# EAGLE board main V.2 (EAGLE 9.1.3)
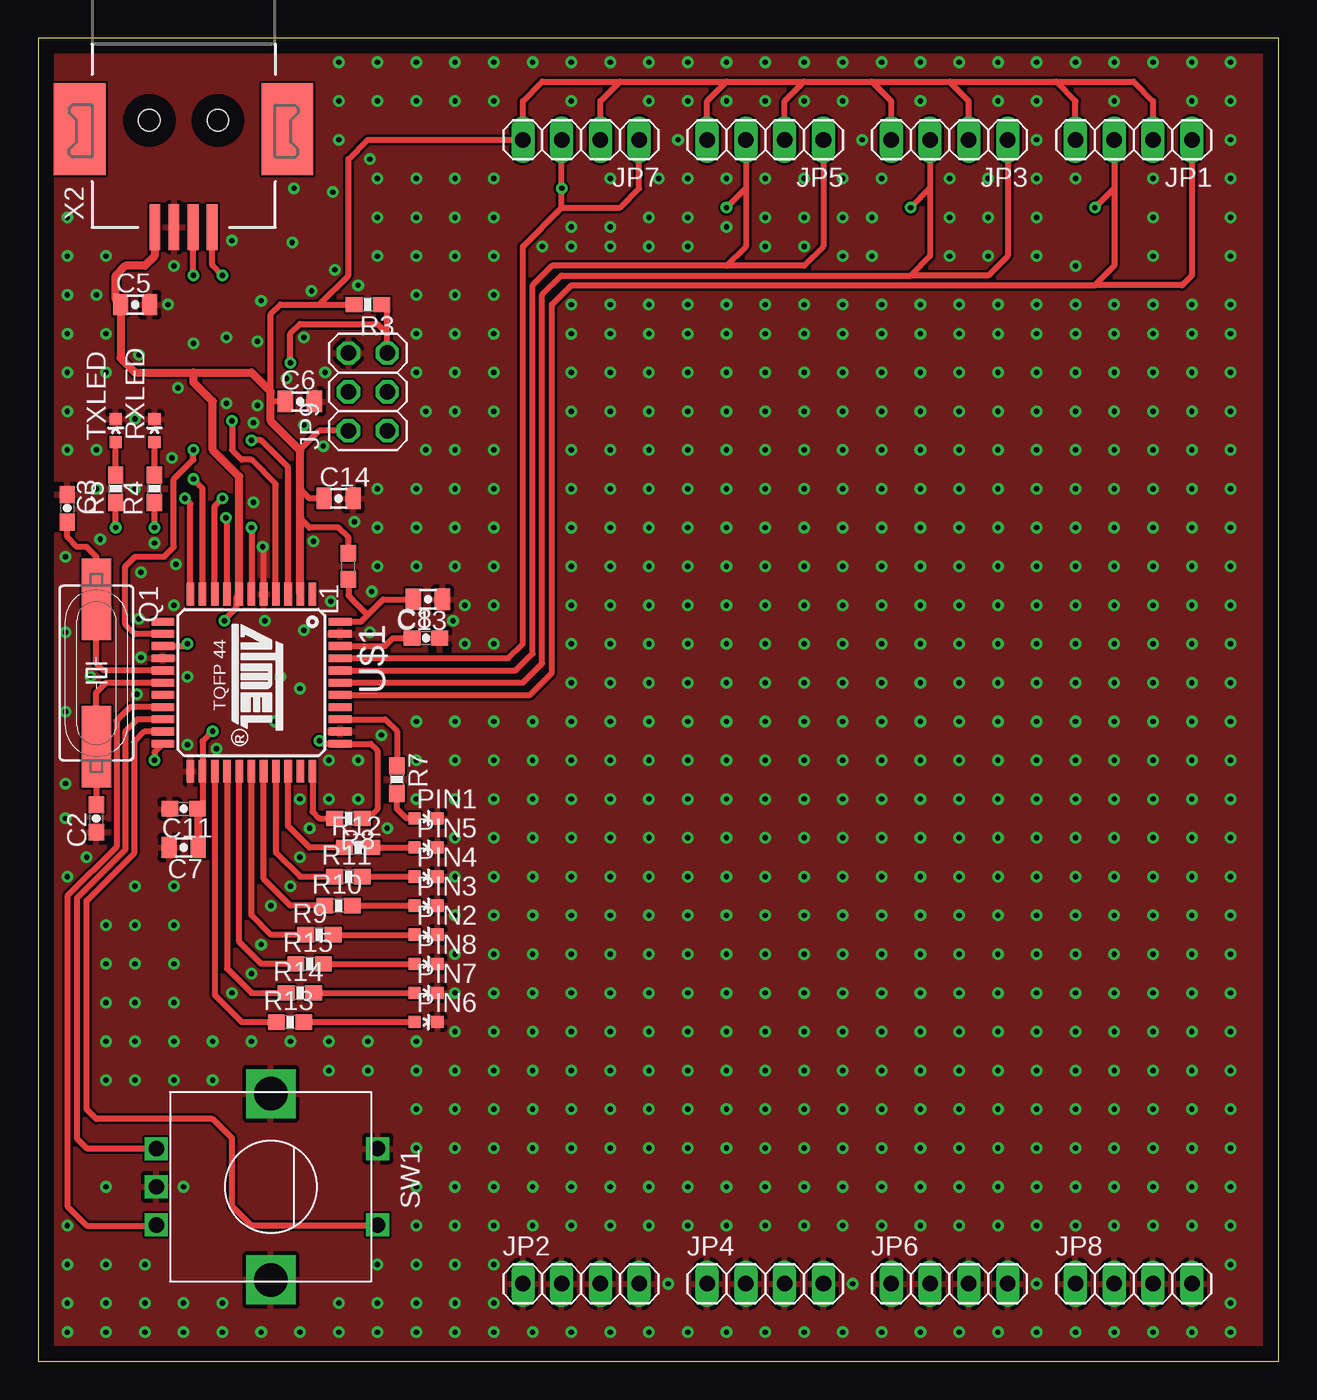
[diagram p0: board, top side]
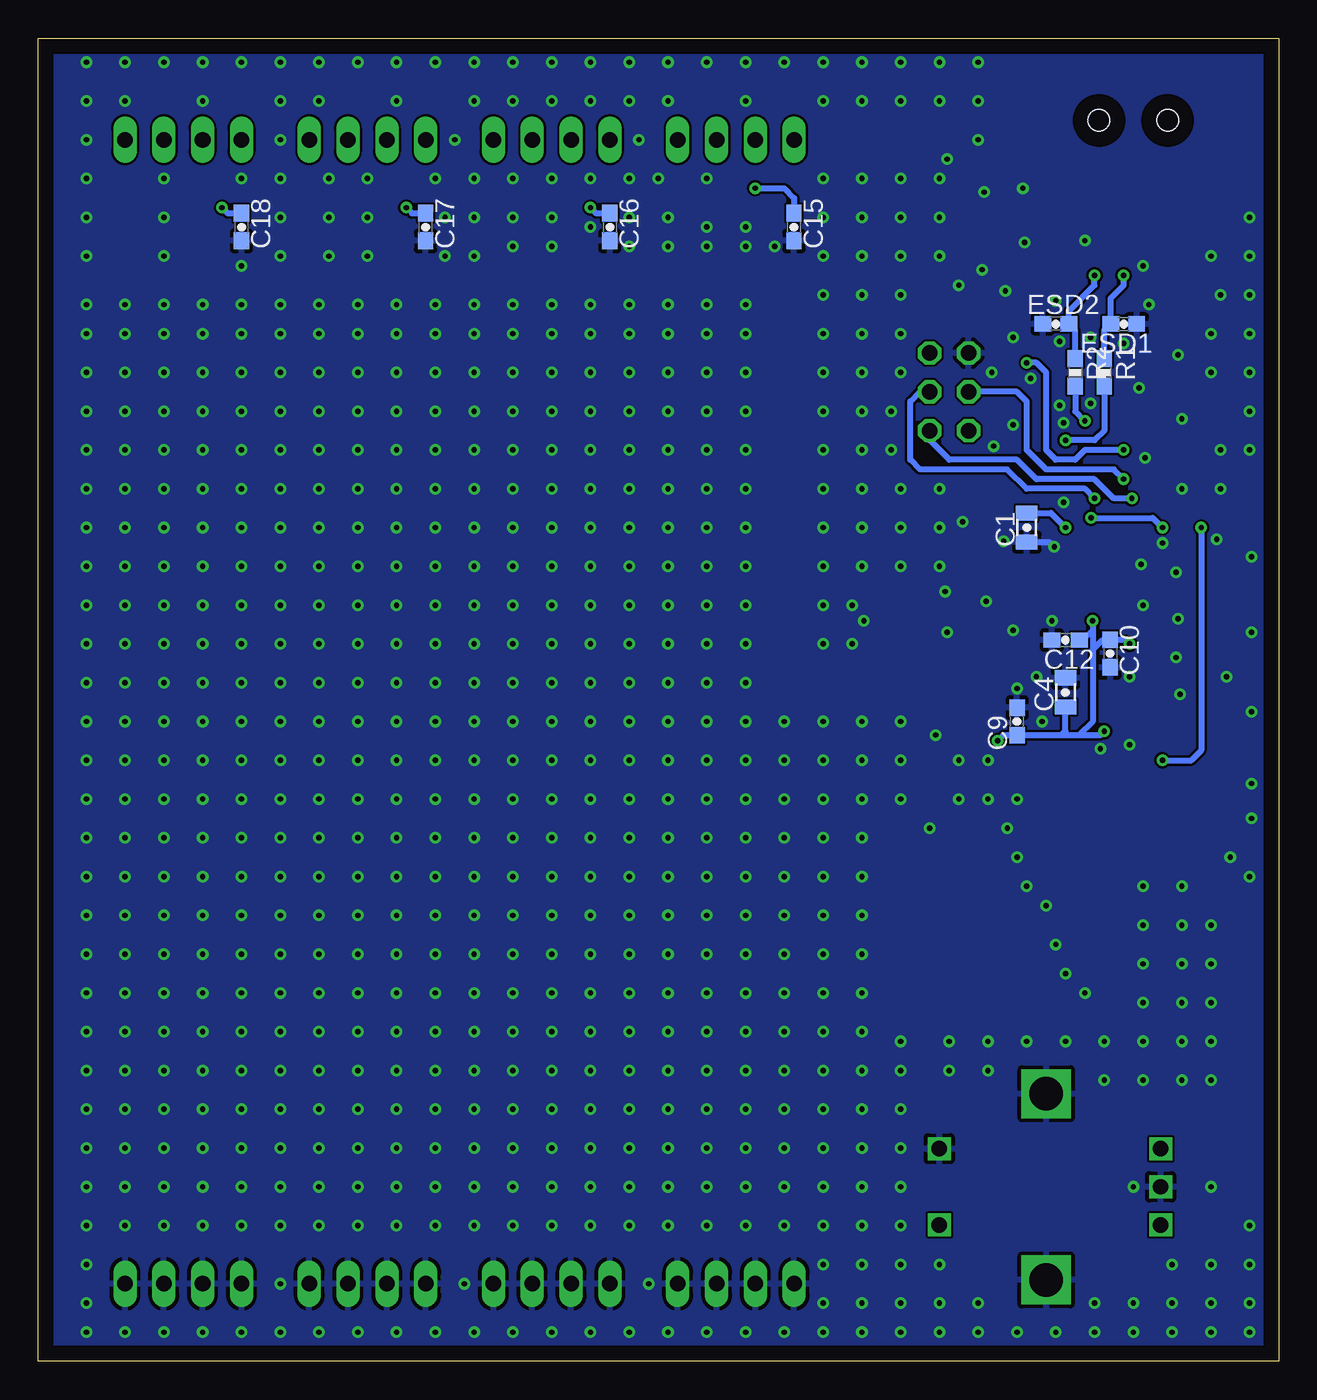
[diagram p1: board, bottom side, seen from below]

Size 81.26 x 86.66 mm. Coordinates in mm from the lower left corner, seen from the top.
Outline: 0,0 81.26,0 81.26,86.66 0,86.66 0,0
Copper layers (1*16): Top 0.035mm / dielectric 1.5mm / Bottom 0.035mm
Design rules "default": minimum track width 6mil, minimum drill 0.35mm, track to track 6mil, track to pad 6mil, pad to pad 6mil, via to via 6mil, smd to smd 6mil, copper to edge 40mil, drill to drill 6mil, minimum pad ring 10mil, minimum via ring 8mil, stop-mask expansion 4mil, vias tented up to drill 0mil, thermal gap 10mil

## Footprints (pad centres in the part's own frame; a part is rotated, then mirrored left to right if it is on the bottom)
CAP-0805 = smd 1 x 1.4: 1 -0.95,0; 2 0.95,0
CAP-0603 = smd 1.1 x 1: 1 -0.9,0; 2 0.9,0
FB-0603 = smd 1.1 x 1: 1 -0.85,0; 2 0.85,0
1X04 = drill 1.016 long: 1 -3.81,0; 2 -1.27,0; 3 1.27,0; 4 3.81,0
2X03 = drill 1.016 octagon: 1 -2.54,-1.27; 2 -2.54,1.27; 3 0,-1.27; 4 0,1.27; 5 2.54,-1.27; 6 2.54,1.27
IND-0603 = smd 1.1 x 1: 1 -0.85,0; 2 0.85,0
LED-0603 = smd 0.8 x 0.8: A 0,-0.75; C 0,0.75
HC49UP = smd 5.334 x 1.93: 1 -4.826,0; 2 4.826,0
RES-0603 = smd 1.1 x 1: 1 -0.9,0; 2 0.9,0
ALPS_EC12E_SW = drill 1 square: A -2.5,-7.5; B 2.5,-7.5; C 0,-7.5; D -2.5,7; E 2.5,7 | drill 2.2 square: GND1 -6.1,0; GND2 6.1,0
TQFP44 = smd 1.5 x 0.5: 1 -5.8,4; 2 -5.8,3.2; 3 -5.8,2.4; 4 -5.8,1.6; 5 -5.8,0.8; 6 -5.8,0; 7 -5.8,-0.8; 8 -5.8,-1.6; 9 -5.8,-2.4; 10 -5.8,-3.2; 11 -5.8,-4; 23 5.8,-4; 24 5.8,-3.2; 25 5.8,-2.4; 26 5.8,-1.6; 27 5.8,-0.8; 28 5.8,0; 29 5.8,0.8; 30 5.8,1.6; 31 5.8,2.4; 32 5.8,3.2; 33 5.8,4 | smd 0.5 x 1.5: 12 -4,-5.8; 13 -3.2,-5.8; 14 -2.4,-5.8; 15 -1.6,-5.8; 16 -0.8,-5.8; 17 0,-5.8; 18 0.8,-5.8; 19 1.6,-5.8; 20 2.4,-5.8; 21 3.2,-5.8; 22 4,-5.8; 34 4,5.8; 35 3.2,5.8; 36 2.4,5.8; 37 1.6,5.8; 38 0.8,5.8; 39 0,5.8; 40 -0.8,5.8; 41 -1.6,5.8; 42 -2.4,5.8; 43 -3.2,5.8; 44 -4,5.8
USB-B-SMT = smd 6.04 x 3.4: 5 0.58,6.8; 6 0.58,-6.8 | smd 3 x 0.7: D+ 7,1.875; D- 7,0.625; GND 7,-0.625; VUSB 7,-1.875 | hole 1.4: 0,2.25; 0,-2.25

## Placement (x,y rotation side)
C1  1uF  [CAP-0805]  16.51,54.61 90 bottom
C2  22pF  [CAP-0603]  3.81,35.56 90 top
C3  22pF  [CAP-0603]  1.91,55.88 270 top
C4  1uF  [CAP-0805]  13.97,43.81 90 bottom
C5  [CAP-0805]  6.35,69.22 0 top
C6  [CAP-0805]  17.15,62.86 0 top
C7  [CAP-0805]  9.53,33.66 180 top
C8  470nF  [CAP-0603]  25.4,47.37 0 top
C9  470pF  [CAP-0603]  17.15,41.91 90 bottom
C10  470pF  [CAP-0603]  11.05,46.36 270 bottom
C11  470pF  [CAP-0603]  9.53,36.2 180 top
C12  470pF  [CAP-0603]  13.97,47.24 180 bottom
C13  [CAP-0805]  25.53,49.91 180 top
C14  1uF  [CAP-0805]  19.69,56.52 0 top
C15  [CAP-0603]  31.75,74.3 270 bottom
C16  [CAP-0603]  43.81,74.3 270 bottom
C17  [CAP-0603]  55.88,74.3 270 bottom
C18  [CAP-0603]  67.94,74.3 270 bottom
ESD1  [FB-0603]  10.16,67.94 180 bottom
ESD2  [FB-0603]  14.61,67.94 0 bottom
JP1  [1X04]  71.75,80.01 180 top
JP2  [1X04]  35.56,5.08 0 top
JP3  [1X04]  59.69,80.01 180 top
JP4  [1X04]  47.63,5.08 0 top
JP5  [1X04]  47.63,80.01 180 top
JP6  [1X04]  59.69,5.08 0 top
JP7  [1X04]  35.56,80.01 180 top
JP8  [1X04]  71.75,5.08 0 top
JP9  [2X03]  21.59,63.5 90 top
L1  [IND-0603]  20.32,52.07 90 top
PIN1  [LED-0603]  25.4,35.56 270 top
PIN2  [LED-0603]  25.4,27.94 270 top
PIN3  [LED-0603]  25.4,29.85 270 top
PIN4  [LED-0603]  25.4,31.75 270 top
PIN5  [LED-0603]  25.4,33.66 270 top
PIN6  [LED-0603]  25.4,22.22 270 top
PIN7  [LED-0603]  25.4,24.13 270 top
PIN8  [LED-0603]  25.4,26.04 270 top
Q1  [HC49UP]  3.81,45.08 270 top
R1  [RES-0603]  11.43,64.77 270 bottom
R2  [RES-0603]  13.34,64.77 270 bottom
R3  22k  [RES-0603]  21.59,69.22 180 top
R4  [RES-0603]  7.62,57.15 90 top
R5  [RES-0603]  5.08,57.15 90 top
R7  [RES-0603]  23.49,38.1 270 top
R8  22k  [RES-0603]  20.32,35.56 180 top
R9  [RES-0603]  18.41,27.94 0 top
R10  [RES-0603]  19.69,29.85 0 top
R11  [RES-0603]  20.32,31.75 0 top
R12  [RES-0603]  20.95,33.66 0 top
R13  [RES-0603]  16.51,22.22 0 top
R14  [RES-0603]  17.15,24.13 0 top
R15  [RES-0603]  17.78,26.04 0 top
RXLED  [LED-0603]  7.62,60.96 0 top
SW1  EC12E_SW  [ALPS_EC12E_SW]  15.24,11.43 270 top
TXLED  [LED-0603]  5.08,60.96 0 top
U$1  ATMEGA32U4-AU  [TQFP44]  13.97,44.45 270 top
X2  USB-B-S  [USB-B-SMT]  9.53,81.28 270 top

## Library data of the parts
C1-C18 ESD1 ESD2 L1 R1-R5 R7-R15 = Ai_Passives
JP1-JP9 = pinhead
PIN1-PIN8 RXLED TXLED = Ai_LED
Q1 = Ai_FrequencyControl
SW1 = switch-alps; MPN: EC12E2424407; OC_FARNELL: 1520813; OC_NEWARK: 74M1068
U$1 = mega32U4
X2 = usb

## Nets
+5V: C4.1 C5.1 C6.1 C7.1 C9.1 C10.1 C11.1 C12.1 C14.1 JP1.2 JP1.4 JP3.2 JP3.4 JP5.2 JP5.4 JP7.2 JP7.4 JP9.2 L1.2 R3.2 R8.1 U$1.2 U$1.7 U$1.14 U$1.24 U$1.34 X2.VUSB
FADER1: C18.1 JP1.1 JP1.3 U$1.38
FADER2: C17.1 JP3.1 JP3.3 U$1.39
FADER3: C16.1 JP5.1 JP5.3 U$1.40
FADER4: C15.1 JP7.1 JP7.3 U$1.41
GND: C1.1 C2.1 C3.1 C4.2 C5.2 C6.2 C7.2 C8.2 C9.2 C10.2 C11.2 C12.2 C13.1 C14.2 C15.2 C16.2 C17.2 C18.2 ESD1.1 ESD2.1 JP2.1 JP2.2 JP2.3 JP2.4 JP4.1 JP4.2 JP4.3 JP4.4 JP6.1 JP6.2 JP6.3 JP6.4 JP8.1 JP8.2 JP8.3 JP8.4 JP9.6 PIN1.C PIN2.C PIN3.C PIN4.C PIN5.C PIN6.C PIN7.C PIN8.C RXLED.C SW1.C SW1.D SW1.GND1 SW1.GND2 TXLED.C U$1.5 U$1.15 U$1.23 U$1.35 U$1.43 X2.GND
MISO: JP9.1 U$1.11
MOSI: JP9.4 U$1.10
N$1: ESD1.2 R1.1 X2.D-
N$2: ESD2.2 R2.1 X2.D+
N$3: R1.2 U$1.3
N$4: R2.2 U$1.4
N$5: R8.2 U$1.33
N$6: C1.2 U$1.6
N$7: C2.2 Q1.2 U$1.17
N$8: C3.2 Q1.1 U$1.16
N$9: R7.1 U$1.36
N$10: R4.1 U$1.8
N$11: R4.2 RXLED.A
N$12: R5.1 U$1.22
N$13: R5.2 TXLED.A
N$16: C8.1 U$1.42
N$17: PIN1.A R7.2
N$18: PIN2.A R9.2
N$19: SW1.E U$1.21
N$20: SW1.A U$1.20
N$21: SW1.B U$1.19
N$22: PIN5.A R12.2
N$23: PIN4.A R11.2
N$24: PIN3.A R10.2
N$25: C13.2 L1.1 U$1.44
N$26: R9.1 U$1.28
N$27: R10.1 U$1.29
N$28: R11.1 U$1.30
N$29: R12.1 U$1.31
N$30: R13.1 U$1.25
N$31: R14.1 U$1.26
N$32: R15.1 U$1.27
N$33: PIN6.A R13.2
N$34: PIN7.A R14.2
N$35: PIN8.A R15.2
RESET: JP9.5 R3.1 U$1.13
SCK: JP9.3 U$1.9

## Tracks (layer width: path | path; a pad name or v marks a point on that pad's centre or on a via)
+5V  (via drill 0.35)
  Top 0.406: U$1.14 9.64,46.85 v9.78,46.99 | v18.41,40.64 18.61,40.45 U$1.34 21.78,40.45 22.23,40 22.23,36.2 21.59,35.56 R8.1 | 13.17,50 U$1.7 12.98,50.06 12.98,49.35 12.19,48.57 v12.19,48.51 | C11.1 10.77,36.54 U$1.24 10.77,40.61 v11.43,41.28 | L1.2 20.32,53.97 19.69,54.61 17.78,54.61 17.17,55.22 17.17,55.24 | JP9.2 18.41,60.96 17.17,59.72 17.17,59.66 | 18.41,69.22 15.88,69.22 15.24,68.58 15.24,63.5 | 18.41,69.22 R3.2 | C14.1 17.78,56.52 17.17,57.12 17.17,57.15 | C6.1 15.24,62.86 | 18.41,69.22 20.32,71.12 20.32,78.74 21.59,80.01 JP7.4 31.75,82.55 33.02,83.82 38.1,83.82 | 38.1,83.82 45.09,83.82 | 45.09,83.82 50.16,83.82 | 50.16,83.82 54.61,83.82 | 54.61,83.82 59.69,83.82 | 59.69,83.82 66.68,83.82 | 66.68,83.82 71.75,83.82 73.03,82.55 JP1.2 | JP1.4 67.94,82.55 66.68,83.82 | JP3.2 60.96,82.55 59.69,83.82 | JP7.2 36.83,82.55 38.1,83.82 | JP5.4 43.81,82.55 45.09,83.82 | JP5.2 48.9,82.55 50.16,83.82 | JP3.4 55.88,82.55 54.61,83.82
  Top 0.508: X2.VUSB 7.62,74.25 7.62,72.39 6.98,71.75 5.71,71.75 5.08,71.12 5.08,69.53 C5.1 5.4,65.72 6.35,64.77 10.16,64.77 | 10.16,64.77 13.97,64.77 15.24,63.5 15.24,62.86 15.24,61.59 17.17,59.66 17.17,57.15 17.17,55.24 U$1.2 | 10.16,64.77 10.16,64.13 11.43,62.86 11.43,59.69 13.17,57.95 U$1.7 | C11.1 10.48,36.14 C7.1
  Bottom 0.406: v9.78,46.99 10.04,47.25 C10.1 11.06,47.24 11.56,47.24 12.19,46.61 | v18.41,40.64 18.05,41.01 C9.1 14.23,41.01 | 13.06,47.25 C12.1 12.83,47.24 12.19,47.88 | 14.23,41.01 13.97,41.28 C4.1 | 14.23,41.01 13.08,41.01 | 13.08,41.01 11.7,41.01 v11.43,41.28 | 13.08,41.01 12.19,41.9 12.19,46.61 | v12.19,48.51 12.19,47.88 | 12.19,47.88 12.19,46.61
FADER1  (via drill 0.35)
  Top 0.406: U$1.38 32.22,43.65 33.66,45.08 33.66,69.22 34.93,70.48 69.22,70.48 | 69.22,70.48 70.49,71.75 70.49,76.83 | JP1.3 70.49,76.83 | 69.22,70.48 74.93,70.48 75.56,71.12 JP1.1 | 70.49,76.83 v69.22,75.56
  Bottom 0.406: v69.22,75.56 68.84,75.19 C18.1
FADER2  (via drill 0.35)
  Top 0.406: U$1.39 31.75,44.45 33.02,45.72 33.02,69.85 34.29,71.12 57.15,71.12 | 57.15,71.12 58.42,72.39 58.42,76.83 | JP3.3 58.42,76.83 | JP3.1 63.5,72.39 62.23,71.12 57.15,71.12 | 58.42,76.83 v57.15,75.56
  Bottom 0.406: v57.15,75.56 56.78,75.19 C17.1
FADER3  (via drill 0.35)
  Top 0.406: U$1.40 31.28,45.25 32.38,46.36 32.38,70.48 33.66,71.75 45.09,71.75 | JP5.3 46.35,76.83 | 46.35,76.83 46.35,73.02 45.09,71.75 | JP5.1 51.43,73.02 50.16,71.75 45.09,71.75 | 46.35,76.83 v45.09,75.56
  Bottom 0.406: v45.09,75.56 44.72,75.19 C16.1
FADER4  (via drill 0.35)
  Top 0.406: U$1.41 30.81,46.05 31.75,46.99 31.75,73.02 34.29,75.56 | 34.29,75.56 v34.29,76.83 | v34.29,76.83 JP7.3 | v34.29,76.83 | 34.29,75.56 38.1,75.56 39.37,76.83 JP7.1
  Bottom 0.406: v34.29,76.83 32.38,76.83 31.75,76.2 C15.1
GND  (via drill 0.35)
  Top 0.406: U$1.5 14.77,53.27 v14.7,53.34
  Bottom 0.406: C1.1 15.02,53.66 v14.7,53.34
  other vias: 8.89,71.75 10.16,66.67 6.6,65.91 8.51,69.22 12.32,67.06 14.35,66.8 17.4,67.06 16.26,64.39 14.35,62.61 9.14,63.75 6.35,61.72 6.35,57.15 7.62,53.59 14.1,56.26 14.1,61.47 18.8,64.77 17.4,61.34 18.67,59.94 12.32,62.74 8.76,59.18 9.02,52.2 6.6,48.64 6.73,51.69 9.78,44.83 9.78,40.39 11.68,40.13 17.15,44.07 17.4,47.88 18.03,53.72 19.18,49.78 21.84,50.42 21.72,47.75 27.18,48.51 29.84,46.99 20.7,54.99 14.61,69.47 17.91,70.1 19.43,71.5 12.7,73.41 16.64,73.28 16.76,76.83 19.3,76.58 20.95,70.48 21.72,78.74 19.69,85.09 22.23,85.09 24.77,85.09 27.3,85.09 29.84,85.09 32.38,85.09 34.93,85.09 37.47,77.47 40.01,85.09 42.55,85.09 45.09,85.09 47.63,85.09 50.16,85.09 52.71,85.09 55.24,85.09 57.79,85.09 60.32,85.09 62.87,85.09 65.41,85.09 67.94,85.09 70.49,85.09 19.69,82.55 22.23,82.55 24.77,82.55 27.3,82.55 29.84,82.55 19.69,80.01 24.77,77.47 22.23,77.47 27.3,77.47 29.84,77.47 22.23,74.93 24.77,74.93 27.3,74.93 29.84,74.93 22.23,72.39 24.77,72.39 27.3,72.39 29.84,72.39 24.77,69.85 27.3,69.85 29.84,69.85 24.77,67.31 27.3,67.31 29.84,67.31 40.01,82.55 34.93,82.55 42.55,82.55 47.63,82.55 45.09,82.55 50.16,82.55 52.71,82.55 57.79,82.55 62.87,82.55 65.41,82.55 70.49,82.55 73.03,85.09 75.56,85.09 75.56,82.55 78.1,85.09 78.1,82.55 78.1,80.01 78.1,77.47 73.03,77.47 65.41,80.01 65.41,77.47 67.94,77.47 65.41,74.93 65.41,72.39 67.94,71.75 73.03,74.93 73.03,72.39 24.77,64.77 27.3,64.77 29.84,64.77 25.4,62.23 27.3,62.23 29.84,62.23 25.4,59.69 27.3,59.69 29.84,59.69 24.77,57.15 27.3,57.15 29.84,57.15 22.23,57.15 22.23,54.61 24.77,54.61 27.3,54.61 29.84,54.61 22.23,52.07 24.77,52.07 27.3,52.07 29.84,52.07 29.84,49.53 27.94,49.53 27.94,46.99 37.47,85.09 40.64,77.47 42.55,77.47 41.91,80.01 45.09,77.47 42.55,74.93 45.09,74.3 40.01,74.93 42.55,73.02 40.01,73.02 37.47,73.02 37.47,74.3 34.93,74.3 34.93,73.02 33.02,73.02 47.63,77.47 50.16,77.47 47.63,74.93 50.16,74.93 47.63,73.02 50.16,73.02 52.71,77.47 55.24,77.47 52.71,74.93 52.71,72.39 54.61,74.93 54.61,72.39 59.69,77.47 59.69,74.93 59.69,72.39 62.23,77.47 62.23,74.93 62.23,72.39 78.1,74.93 78.1,72.39 34.93,67.31 34.93,64.77 37.47,67.31 37.47,64.77 37.47,69.22 34.93,69.22 40.01,69.22 42.55,69.22 45.09,69.22 47.63,69.22 53.98,80.01 50.16,69.22 52.71,69.22 55.24,69.22 57.79,69.22 60.32,69.22 62.87,69.22 65.41,69.22 67.94,69.22 70.49,69.22 73.03,69.22 75.56,69.22 78.1,69.22 40.01,67.31 42.55,67.31 45.09,67.31 47.63,67.31 50.16,67.31 52.71,67.31 55.24,67.31 57.79,67.31 60.32,67.31 62.87,67.31 65.41,67.31 67.94,67.31 70.49,67.31 73.03,67.31 75.56,67.31 78.1,67.31 40.01,64.77 42.55,64.77 45.09,64.77 47.63,64.77 50.16,64.77 52.71,64.77 55.24,64.77 57.79,64.77 60.32,64.77 62.87,64.77 65.41,64.77 67.94,64.77 40.01,57.15 42.55,57.15 45.09,57.15 47.63,57.15 34.93,1.91 37.47,1.91 40.01,1.91 42.55,1.91 45.09,1.91 47.63,1.91 50.16,1.91 52.71,1.91 55.24,1.91 57.79,1.91 60.32,1.91 62.87,1.91 65.41,1.91 67.94,1.91 70.49,1.91 73.03,1.91 70.49,8.89 73.03,8.89 75.56,8.89 78.1,8.89 78.1,6.35 78.1,3.81 78.1,1.91 75.56,1.91 60.32,8.89 62.87,8.89 65.41,8.89 67.94,8.89 65.41,5.08 70.49,11.43 73.03,11.43 75.56,11.43 78.1,11.43 70.49,13.97 73.03,13.97 75.56,13.97 78.1,13.97 70.49,16.51 73.03,16.51 75.56,16.51 78.1,16.51 70.49,19.05 73.03,19.05 75.56,19.05 78.1,19.05 70.49,21.59 73.03,21.59 75.56,21.59 78.1,21.59 70.49,24.13 73.03,24.13 75.56,24.13 78.1,24.13 70.49,26.67 73.03,26.67 75.56,26.67 78.1,26.67 70.49,29.21 73.03,29.21 75.56,29.21 78.1,29.21 70.49,31.75 73.03,31.75 75.56,31.75 78.1,31.75 70.49,34.29 73.03,34.29 75.56,34.29 78.1,34.29 70.49,36.83 73.03,36.83 75.56,36.83 78.1,36.83 70.49,39.37 73.03,39.37 75.56,39.37 78.1,39.37 70.49,41.91 73.03,41.91 75.56,41.91 78.1,41.91 70.49,44.45 73.03,44.45 75.56,44.45 78.1,44.45 70.49,46.99 73.03,46.99 75.56,46.99 78.1,46.99 70.49,49.53 73.03,49.53 75.56,49.53 78.1,49.53 70.49,52.07 73.03,52.07 75.56,52.07 78.1,52.07 70.49,54.61 73.03,54.61 75.56,54.61 78.1,54.61 70.49,57.15 73.03,57.15 75.56,57.15 78.1,57.15 70.49,59.69 73.03,59.69 75.56,59.69 78.1,59.69 70.49,62.23 73.03,62.23 75.56,62.23 78.1,62.23 70.49,64.77 73.03,64.77 75.56,64.77 78.1,64.77 40.01,62.23 42.55,62.23 45.09,62.23 47.63,62.23 50.16,62.23 52.71,62.23 55.24,62.23 57.79,62.23 60.32,62.23 62.87,62.23 65.41,62.23 67.94,62.23 34.93,62.23 34.93,59.69 37.47,62.23 37.47,59.69 40.01,59.69 42.55,59.69 45.09,59.69 47.63,59.69 34.93,57.15 34.93,54.61 37.47,57.15 37.47,54.61 40.01,54.61 42.55,54.61 45.09,54.61 47.63,54.61 50.16,54.61 52.71,54.61 55.24,54.61 57.79,54.61 50.16,57.15 52.71,57.15 55.24,57.15 57.79,57.15 50.16,59.69 52.71,59.69 55.24,59.69 57.79,59.69 60.32,59.69 62.87,59.69 65.41,59.69 67.94,59.69 60.32,57.15 62.87,57.15 65.41,57.15 67.94,57.15 60.32,54.61 62.87,54.61 65.41,54.61 67.94,54.61 60.32,52.07 62.87,52.07 65.41,52.07 67.94,52.07 60.32,49.53 62.87,49.53 65.41,49.53 67.94,49.53 60.32,46.99 62.87,46.99 65.41,46.99 67.94,46.99 60.32,44.45 62.87,44.45 65.41,44.45 67.94,44.45 60.32,41.91 62.87,41.91 65.41,41.91 67.94,41.91 60.32,39.37 62.87,39.37 65.41,39.37 67.94,39.37 60.32,36.83 62.87,36.83 65.41,36.83 67.94,36.83 60.32,34.29 62.87,34.29 65.41,34.29 67.94,34.29 60.32,31.75 62.87,31.75 65.41,31.75 67.94,31.75 60.32,29.21 62.87,29.21 65.41,29.21 67.94,29.21 60.32,26.67 62.87,26.67 65.41,26.67 67.94,26.67 60.32,24.13 62.87,24.13 65.41,24.13 67.94,24.13 60.32,21.59 62.87,21.59 65.41,21.59 67.94,21.59 60.32,19.05 62.87,19.05 65.41,19.05 67.94,19.05 60.32,16.51 62.87,16.51 65.41,16.51 67.94,16.51 60.32,13.97 62.87,13.97 65.41,13.97 67.94,13.97 60.32,11.43 62.87,11.43 65.41,11.43 67.94,11.43 50.16,52.07 52.71,52.07 55.24,52.07 57.79,52.07 40.01,52.07 42.55,52.07 45.09,52.07 47.63,52.07 34.93,52.07 34.93,49.53 37.47,52.07 37.47,49.53 40.01,49.53 42.55,49.53 45.09,49.53 47.63,49.53 50.16,49.53 52.71,49.53 55.24,49.53 57.79,49.53 50.16,46.99 52.71,46.99 55.24,46.99 57.79,46.99 50.16,44.45 52.71,44.45 55.24,44.45 57.79,44.45 50.16,41.91 52.71,41.91 55.24,41.91 57.79,41.91 50.16,39.37 52.71,39.37 55.24,39.37 57.79,39.37 50.16,36.83 52.71,36.83 55.24,36.83 57.79,36.83 50.16,34.29 52.71,34.29 55.24,34.29 57.79,34.29 50.16,31.75 52.71,31.75 55.24,31.75 57.79,31.75 50.16,29.21 52.71,29.21 55.24,29.21 57.79,29.21 50.16,26.67 52.71,26.67 55.24,26.67 57.79,26.67 50.16,24.13 52.71,24.13 55.24,24.13 57.79,24.13 50.16,21.59 52.71,21.59 55.24,21.59 57.79,21.59 50.16,19.05 52.71,19.05 55.24,19.05 57.79,19.05 50.16,16.51 52.71,16.51 55.24,16.51 57.79,16.51 50.16,13.97 52.71,13.97 55.24,13.97 57.79,13.97 50.16,11.43 52.71,11.43 55.24,11.43 57.79,11.43 50.16,8.89 52.71,8.89 55.24,8.89 57.79,8.89 40.01,46.99 42.55,46.99 45.09,46.99 47.63,46.99 40.01,44.45 42.55,44.45 45.09,44.45 47.63,44.45 34.93,46.99 34.93,44.45 37.47,46.99 37.47,44.45 40.01,41.91 42.55,41.91 45.09,41.91 47.63,41.91 34.93,41.91 34.93,39.37 37.47,41.91 37.47,39.37 32.38,41.91 32.38,39.37 29.84,41.91 29.84,39.37 27.3,41.91 27.3,39.37 24.77,41.91 24.77,39.37 29.84,36.83 29.84,34.29 27.3,36.83 24.77,36.83 27.3,34.29 29.84,21.59 29.84,19.05 27.3,21.59 12.7,24.13 13.97,25.4 14.61,27.31 15.24,29.85 16.51,31.11 17.15,33.02 17.78,34.92 17.15,36.83 19.05,36.83 20.95,36.83 20.95,39.37 19.05,39.37 22.86,34.92 27.3,19.05 24.77,19.05 21.59,19.05 19.05,19.05 21.59,20.96 24.77,20.96 19.05,20.96 16.51,20.96 13.97,20.96 11.43,20.96 11.43,18.41 8.89,18.41 8.89,20.96 6.35,18.41 4.45,18.41 6.35,20.96 8.89,23.5 6.35,23.5 4.45,20.96 4.45,23.5 8.89,26.04 6.35,26.04 4.45,26.04 8.89,28.57 6.35,28.57 4.45,28.57 8.89,31.11 6.35,31.11 1.91,31.75 3.18,33.02 3.43,44.83 1.78,42.55 1.78,37.85 1.78,35.56 1.78,47.75 1.78,52.7 4.06,53.85 6.73,46.1 6.48,43.69 34.93,36.83 34.93,34.29 37.47,36.83 37.47,34.29 32.38,36.83 32.38,34.29 40.01,39.37 42.55,39.37 45.09,39.37 47.63,39.37 40.01,36.83 42.55,36.83 45.09,36.83 47.63,36.83 40.01,34.29 42.55,34.29 45.09,34.29 47.63,34.29 29.84,31.75 29.84,29.21 27.3,31.75 27.3,29.21 34.93,31.75 34.93,29.21 37.47,31.75 37.47,29.21 32.38,31.75 32.38,29.21 40.01,31.75 42.55,31.75 45.09,31.75 47.63,31.75 40.01,29.21 42.55,29.21 45.09,29.21 47.63,29.21 29.84,26.67 29.84,24.13 27.3,26.67 27.3,24.13 34.93,26.67 34.93,24.13 37.47,26.67 37.47,24.13 32.38,26.67 32.38,24.13 40.01,26.67 42.55,26.67 45.09,26.67 47.63,26.67 40.01,24.13 42.55,24.13 45.09,24.13 47.63,24.13 40.01,21.59 42.55,21.59 45.09,21.59 47.63,21.59 34.93,21.59 34.93,19.05 37.47,21.59 37.47,19.05 32.38,21.59 32.38,19.05 40.01,19.05 42.55,19.05 45.09,19.05 47.63,19.05 40.01,16.51 42.55,16.51 45.09,16.51 47.63,16.51 34.93,16.51 34.93,13.97 37.47,16.51 37.47,13.97 32.38,16.51 32.38,13.97 29.84,16.51 29.84,13.97 27.3,16.51 24.77,16.51 27.3,13.97 24.77,13.97 40.01,13.97 42.55,13.97 45.09,13.97 47.63,13.97 40.01,11.43 42.55,11.43 45.09,11.43 47.63,11.43 40.01,8.89 42.55,8.89 45.09,8.89 47.63,8.89 41.27,5.08 53.34,5.08 34.93,11.43 34.93,8.89 37.47,11.43 37.47,8.89 32.38,11.43 32.38,8.89 29.84,8.89 29.84,6.35 27.3,8.89 24.77,8.89 27.3,6.35 24.77,6.35 22.23,6.35 29.84,11.43 27.3,11.43 24.77,11.43 29.84,1.91 32.38,1.91 27.3,1.91 29.84,3.81 27.3,3.81 24.77,3.81 24.77,1.91 22.23,3.81 19.69,3.81 19.69,1.91 22.23,1.91 17.15,1.91 14.61,1.91 12.07,1.91 12.07,3.81 9.53,1.91 9.53,3.81 6.98,1.91 6.98,3.81 6.98,6.35 4.45,6.35 4.45,3.81 4.45,1.91 1.91,1.91 1.91,3.81 1.91,6.35 4.45,11.43 1.91,8.89 9.53,11.43 1.91,74.93 1.91,72.39 4.45,72.39 1.91,69.85 3.81,69.85 1.91,67.31 4.45,67.31 1.91,64.77 4.45,64.77 1.91,62.23 1.91,59.69 3.81,59.69 3.81,57.15 22.48,41.02 8.89,49.53 15.88,44.83 14.86,48.51 15.49,41.91
  pour Top (isolate 0.051): 84.46,91.44 84.46,-3.81 -1.9,-3.81 -1.9,91.44
  pour Bottom (isolate 0.051): -2.54,92.08 85.09,92.08 85.09,-4.44 -2.54,-4.44
MISO  (via drill 0.35)
  Top 0.406: U$1.11 9.97,56.17 v9.62,56.52
  Bottom 0.406: v9.62,56.52 10.8,56.52 12.07,57.78 15.88,57.78 17.15,59.05 21.59,59.05 22.86,60.33 JP9.1
MOSI  (via drill 0.35)
  Top 0.406: U$1.10 10.77,57.17 v10.16,57.78
  Bottom 0.406: v10.16,57.78 10.8,58.42 15.24,58.42 16.51,59.69 16.51,62.86 17.15,63.5 JP9.4
N$1  (via drill 0.35)
  Top 0.406: v10.16,71.12 v10.15,71.13 X2.D-
  Bottom 0.406: R1.1 11.43,67.52 ESD1.2 11.01,69.63 10.16,70.48 v10.16,71.12
N$2  (via drill 0.35)
  Top 0.406: X2.D+ 11.4,71.78 v12.07,71.12
  Bottom 0.406: R2.1 13.34,67.52 ESD2.2 13.76,68.8 12.07,70.48 v12.07,71.12
N$3  (via drill 0.35)
  Top 0.406: v13.97,60.33 14.61,60.33 16.37,58.56 U$1.3
  Bottom 0.406: R1.2 11.43,60.96 12.07,60.33 v13.97,60.33
N$4  (via drill 0.35)
  Top 0.406: v12.7,61.59 12.7,59.69 13.34,59.05 13.97,59.05 15.57,57.45 U$1.4
  Bottom 0.406: R2.2 13.34,62.23 v12.7,61.59
N$5
  Top 0.406: U$1.33 17.97,36 18.41,35.56 R8.2
N$6  (via drill 0.35)
  Top 0.406: v13.97,54.61 U$1.6
  Bottom 0.406: C1.2 14.92,55.56 v13.97,54.61
N$7
  Top 0.406: U$1.17 4.45,44.45 3.81,43.81 Q1.2 C2.2
N$8
  Top 0.406: U$1.16 4.28,45.25 3.81,45.72 Q1.1 3.81,52.7 3.18,53.34 2.54,53.34 1.91,53.97 C3.2
N$9
  Top 0.406: U$1.36 22.72,42.05 23.49,41.28 R7.1
N$10  (via drill 0.35)
  Top 0.406: U$1.8 12.37,55.18 v12.3,55.24 | v7.62,54.61 R4.1
  Bottom 0.406: v7.62,54.61 8.26,55.24 v12.3,55.24
N$11
  Top 0.406: R4.2 RXLED.A
N$12  (via drill 0.35)
  Top 0.406: v5.08,54.61 R5.1 | U$1.22 7.62,39.9 v7.62,39.37
  Bottom 0.406: v5.08,54.61 5.08,40 5.71,39.37 v7.62,39.37
N$13
  Top 0.406: R5.2 TXLED.A
N$16
  Top 0.406: U$1.42 22.72,46.85 23.24,47.37 C8.1
N$17
  Top 0.406: PIN1.A 24.13,35.56 23.49,36.2 R7.2
N$18
  Top 0.406: R9.2 PIN2.A
N$19
  Top 0.406: SW1.E 22.2,8.89 13.97,8.89 12.7,10.16 12.7,14.61 11.43,15.88 3.81,15.88 3.18,16.51 3.18,30.17 6.27,33.27 6.27,40.56 6.96,41.25 U$1.21
N$20
  Top 0.406: SW1.A 3.21,13.93 2.54,14.61 2.54,30.32 5.71,33.5 5.71,39.37 5.71,41.28 6.49,42.05 U$1.20
N$21
  Top 0.406: U$1.19 6.02,42.85 5.13,41.96 5.13,33.71 1.91,30.48 1.91,10.16 3.18,8.89 7.7,8.89 SW1.B
N$22
  Top 0.406: R12.2 PIN5.A
N$23
  Top 0.406: R11.2 PIN4.A
N$24
  Top 0.406: R10.2 PIN3.A
N$25
  Top 0.406: U$1.44 21.15,48.45 21.59,48.89 | L1.1 20.32,50.17 20.57,49.91 21.59,48.89 | 21.59,48.89 22.61,49.91 C13.2
N$26
  Top 0.406: U$1.28 13.97,29.21 15.24,27.94 R9.1
N$27
  Top 0.406: U$1.29 14.77,31.58 16.51,29.85 R10.1
N$28
  Top 0.406: R11.1 17.15,31.75 15.57,33.33 U$1.30
N$29
  Top 0.406: U$1.31 16.37,35.06 17.78,33.66 R12.1
N$30
  Top 0.406: U$1.25 11.57,23.99 13.34,22.22 R13.1
N$31
  Top 0.406: U$1.26 12.37,25.73 13.97,24.13 R14.1
N$32
  Top 0.406: U$1.27 13.17,27.47 14.61,26.04 R15.1
N$33
  Top 0.406: R13.2 PIN6.A
N$34
  Top 0.406: R14.2 PIN7.A
N$35
  Top 0.406: R15.2 PIN8.A
RESET  (via drill 0.35)
  Top 0.406: R3.1 22.86,68.84 22.86,67.31 | JP9.5 22.86,67.31 | U$1.13 6.38,47.65 6.35,47.62 5.71,48.26 5.71,52.07 6.35,52.7 8.26,52.7 8.89,53.34 8.89,57.78 10.16,59.05 v10.16,59.69 | 22.86,67.31 22.23,67.94 17.15,67.94 16.51,67.31 v16.51,65.41
  Bottom 0.406: v10.16,59.69 12.7,59.69 13.34,59.05 14.61,59.05 15.24,59.69 15.24,64.77 15.88,65.41 v16.51,65.41
SCK  (via drill 0.35)
  Top 0.406: U$1.9 11.57,56.02 v12.07,56.52
  Bottom 0.406: v12.07,56.52 12.7,57.15 16.51,57.15 17.78,58.42 23.49,58.42 24.13,59.05 24.13,62.86 23.49,63.5 JP9.3